# EAGLE board schematic (EAGLE 7.3.0)
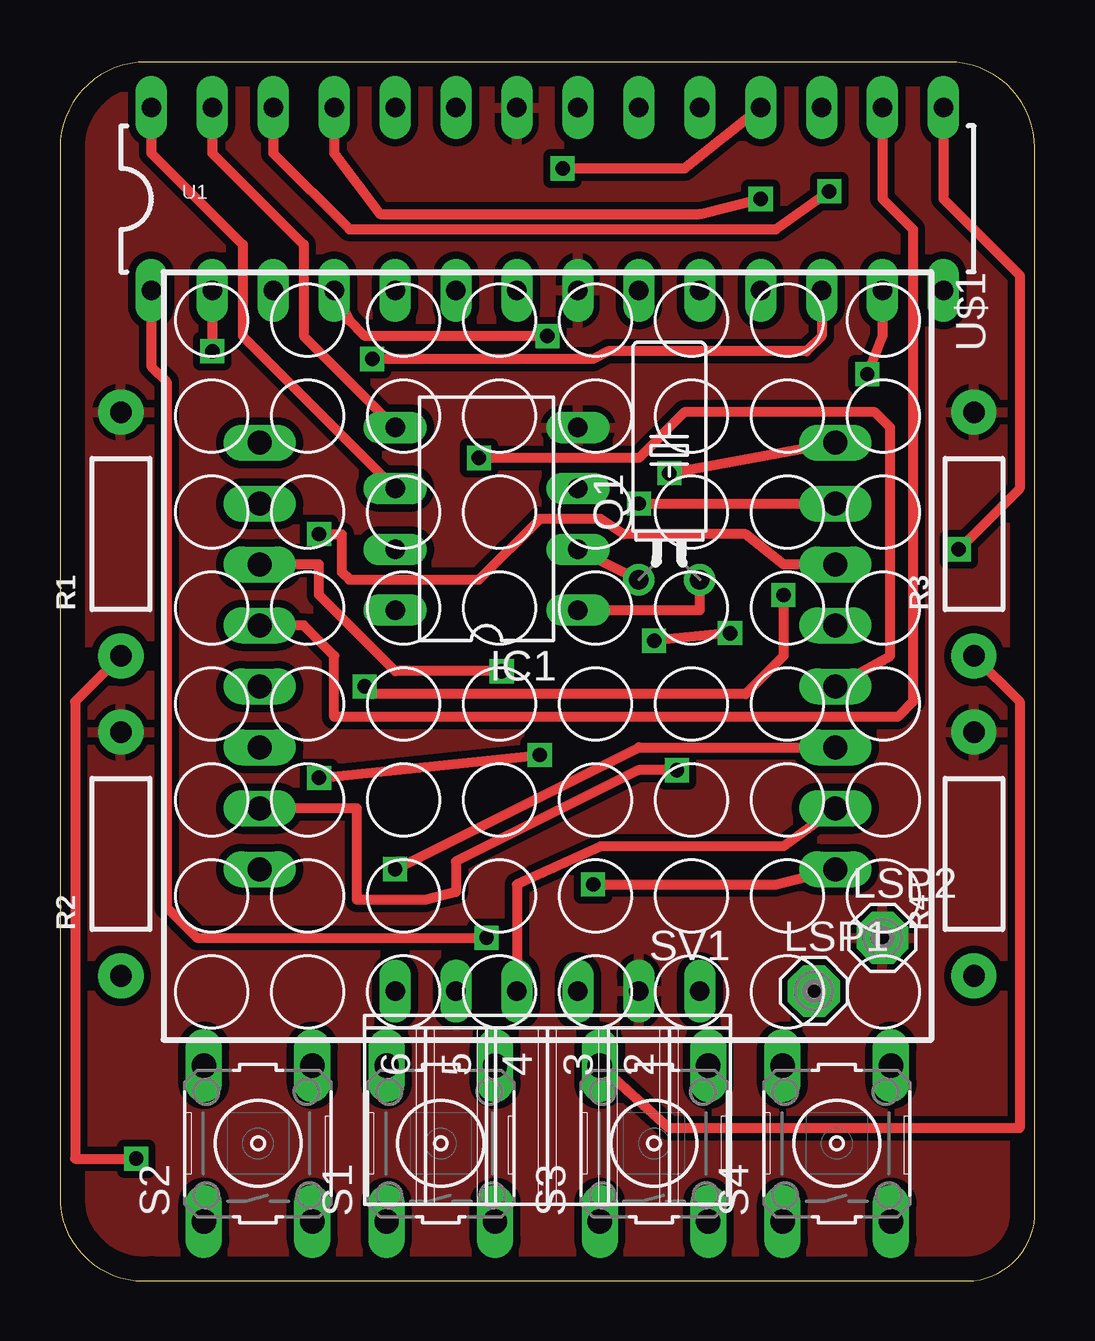
[diagram p0: board, top side]
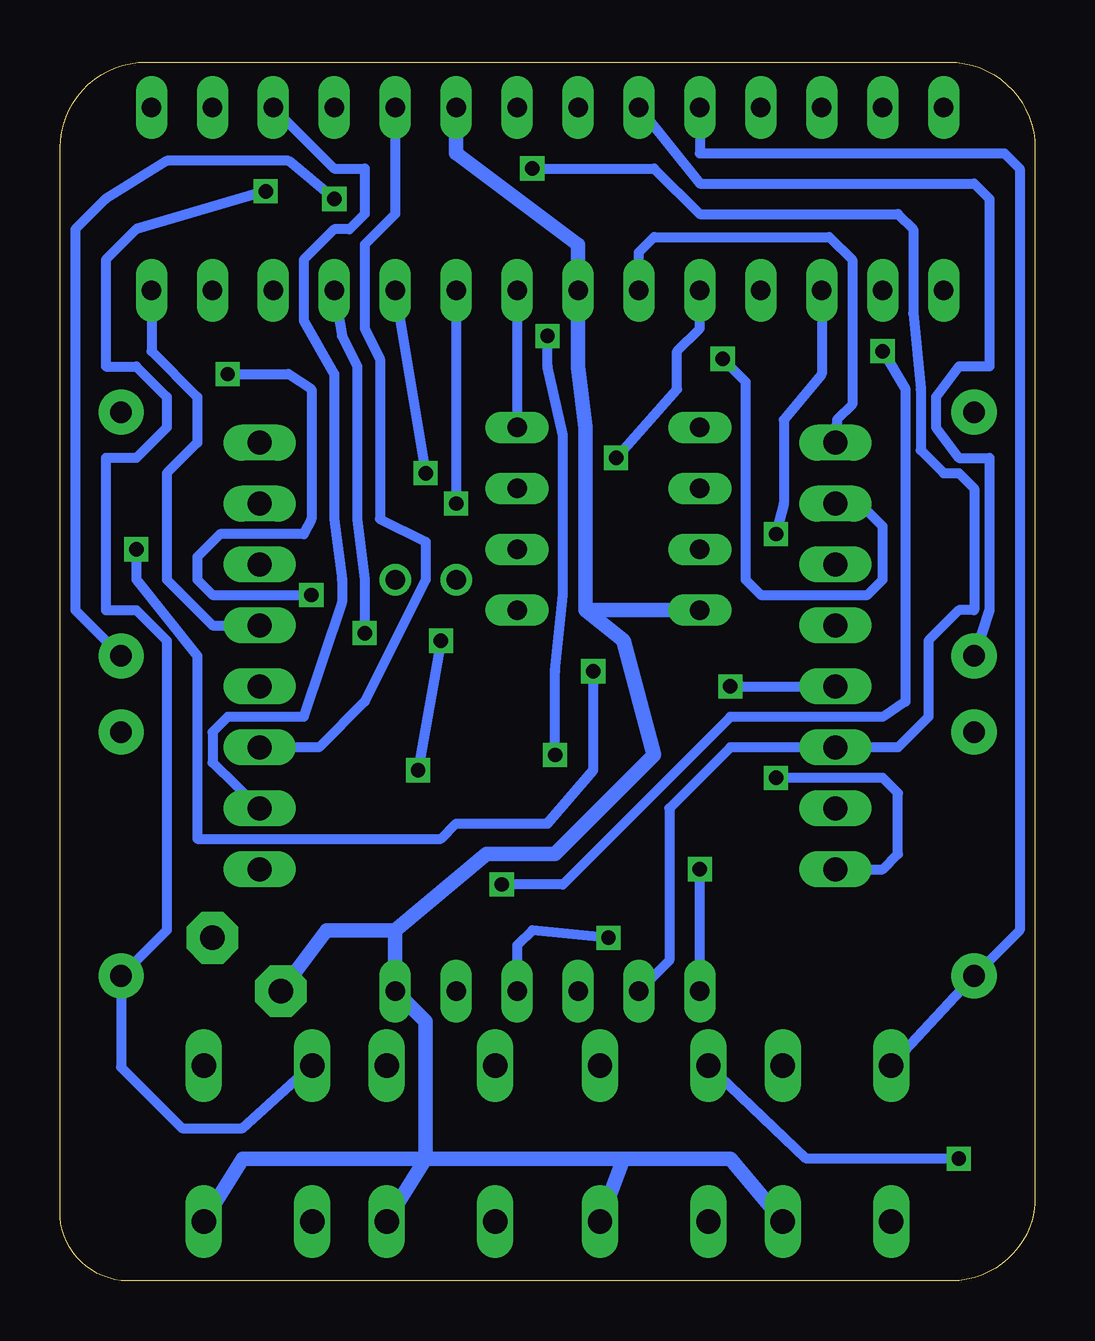
[diagram p1: board, bottom side, seen from below]

Size 40.64 x 50.8 mm. Coordinates in mm from the lower left corner, seen from the top.
Outline: 0,47.22 0,3.19 arc90 3.81,0.01 38.09,0.01 arc90 40.63,3.18 40.63,47.23 arc90 37.05,50.8 3.59,50.8 arc90 0,47.22
Copper layers (1*16): Top 0.035mm / dielectric 1.5mm / Bottom 0.035mm
Design rules "default": minimum track width 10mil, minimum drill 24mil, track to track 8mil, track to pad 8mil, pad to pad 8mil, via to via 8mil, smd to smd 8mil, copper to edge 40mil, drill to drill 8mil, minimum pad ring 10mil, minimum via ring 8mil, stop-mask expansion 4mil, vias tented up to drill 0mil, thermal gap 10mil

## Footprints (pad centres in the part's own frame; a part is rotated, then mirrored left to right if it is on the bottom)
DIL08 = drill 0.813 long: 1 -3.81,-3.81; 2 -1.27,-3.81; 3 1.27,-3.81; 4 3.81,-3.81; 5 3.81,3.81; 6 1.27,3.81; 7 -1.27,3.81; 8 -3.81,3.81
MCS10B = drill 1.016 pad 2.159 octagon: MP 0,0
TC38H = drill 0.813: 1 -1.27,0; 2 1.27,0
AXIAL-0.4 = drill 0.9 pad 1.88: P$1 -5.08,0; P$2 5.08,0
B3F-10XX = drill 1.016 long: 1 -3.251,2.261; 2 3.251,2.261; 3 -3.251,-2.261; 4 3.251,-2.261
FE06W = drill 0.813 long: 1 -6.35,0; 2 -3.81,0; 3 -1.27,0; 4 1.27,0; 5 3.81,0; 6 6.35,0
DIL28-3 = drill 0.813 long: 1 -16.51,-3.81; 2 -13.97,-3.81; 3 -11.43,-3.81; 4 -8.89,-3.81; 5 -6.35,-3.81; 6 -3.81,-3.81; 7 -1.27,-3.81; 8 1.27,-3.81; 9 3.81,-3.81; 10 6.35,-3.81; 11 8.89,-3.81; 12 11.43,-3.81; 13 13.97,-3.81; 14 16.51,-3.81; 15 16.51,3.81; 16 13.97,3.81; 17 11.43,3.81; 18 8.89,3.81; 19 6.35,3.81; 20 3.81,3.81; 21 1.27,3.81; 22 -1.27,3.81; 23 -3.81,3.81; 24 -6.35,3.81; 25 -8.89,3.81; 26 -11.43,3.81; 27 -13.97,3.81; 28 -16.51,3.81
NFM-12881BG-11 = drill 1 long: 1 -8.89,-12; 2 -6.35,-12; 3 -3.81,-12; 4 -1.27,-12; 5 1.27,-12; 6 3.81,-12; 7 6.35,-12; 8 8.89,-12; 9 8.89,12; 10 6.35,12; 11 3.81,12; 12 1.27,12; 13 -1.27,12; 14 -3.81,12; 15 -6.35,12; 16 -8.89,12

## Placement (x,y rotation side)
IC1  PFC8583P  [DIL08]  17.78,31.76 90 top
LSP1  MCS10B  [MCS10B]  31.43,12.08 0 top
LSP2  MCS10B  [MCS10B]  34.29,14.3 0 top
Q1  [TC38H]  25.4,29.22 0 top
R1  [AXIAL-0.4]  2.54,31.13 90 top
R2  [AXIAL-0.4]  2.54,17.79 90 top
R3  [AXIAL-0.4]  38.1,31.13 90 top
R4  [AXIAL-0.4]  38.1,17.79 90 top
S1  [B3F-10XX]  15.88,5.73 90 top
S2  [B3F-10XX]  8.25,5.73 90 top
S3  [B3F-10XX]  24.77,5.73 90 top
S4  [B3F-10XX]  32.39,5.73 90 top
SV1  [FE06W]  20.32,12.08 180 top
U1  ATMEGA328P_PDIP  [DIL28-3]  20.32,45.1 0 top
U$1  NFM-12881BG-11  [NFM-12881BG-11]  20.32,26.05 270 top

## Library data of the parts
IC1 = micro-philips; OC_FARNELL: unknown; OC_NEWARK: unknown
LSP1 LSP2 = solpad
Q1 = crystal; OC_FARNELL: unknown; OC_NEWARK: unknown
R1-R4 = SparkFun-Passives
S1-S4 = switch-omron; MPN: B3F-1000; OC_FARNELL: 176432; OC_NEWARK: 36M3542
SV1 = con-lsta; OC_FARNELL: unknown; OC_NEWARK: unknown
U1 = SparkFun-DigitalIC
U$1 = eagle-library-edeca.net-v5

## Nets
GND: IC1.4 LSP2.MP R1.P$2 R2.P$2 R3.P$2 R4.P$2 SV1.2 U1.8 U1.22
N$2: R2.P$1 S2.2 U1.24
N$3: R1.P$1 S1.2 U1.23
N$4: R3.P$1 S3.2 U1.25
N$5: R4.P$1 S4.2 U1.26
N$9: IC1.1 Q1.2
N$10: IC1.2 Q1.1
N$11: SV1.6 U1.19 U$1.11
N$12: SV1.5 U1.18 U$1.6
N$13: SV1.4 U1.17 U$1.10
N$14: SV1.3 U1.1
N$15: U1.2 U$1.9
N$16: U1.3 U$1.14
N$17: U1.4 U$1.8
N$18: U1.5 U$1.12
N$19: U1.6 U$1.1
N$20: U1.11 U$1.7
N$21: U1.12 U$1.2
N$22: U1.13 U$1.5
N$23: U1.14 U$1.13
N$24: U1.15 U$1.3
N$25: U1.16 U$1.4
N$26: U1.9 U$1.15
N$27: U1.10 U$1.16
N$29: IC1.6 U1.28
N$30: IC1.5 U1.27
VCC: IC1.8 LSP1.MP S1.3 S2.3 S3.3 S4.3 SV1.1 U1.7 U1.20

## Tracks (layer width: path | path; a pad name or v marks a point on that pad's centre or on a via)
GND
  Bottom 0.406: U1.8 IC1.4
  pour Top (isolate 0.305): 0,47.64 0,2.55 0.64,1.28 1.91,0.01 6.35,0.01 37.47,0.01 39.37,0.65 40.64,1.92 40.64,47 40,48.91 38.1,50.81 3.18,50.81 1.27,50.18 0.64,49.54
N$2
  Bottom 0.406: S2.2 R2.P$1 0.64,14.62 0.64,46.37 1.27,47 13.97,47 U1.24
N$3  (via drill 0.6)
  Top 0.406: R1.P$1 0.64,24.14 0.64,5.09 v3.18,5.09
  Bottom 0.406: v3.18,5.09 9.53,5.09 S1.2 | U1.23 13.97,45.73 2.54,45.73 1.91,45.1 1.91,38.11 3.18,38.11 4.13,36.84 4.13,35.57 3.18,34.3 1.91,34.3 1.91,27.95 R1.P$1
N$4  (via drill 0.6)
  Top 0.406: R3.P$1 40,24.14 40,6.36 25.4,6.36 S3.2 | U1.25 11.43,47 13.34,44.46 26.67,44.46 v29.21,45.1
  Bottom 0.406: v29.21,45.1 31.11,46.69 36.2,46.69 38.73,45.1 40,43.83 40,27.95 R3.P$1
N$5  (via drill 0.6)
  Top 0.406: U1.26 8.89,47 12.07,43.83 29.85,43.83 v32.07,45.42
  Bottom 0.406: S4.2 33.02,6.36 35.56,6.36 38.1,8.9 R4.P$1 36.2,14.62 36.2,26.68 37.47,27.95 38.73,27.95 38.73,34.3 37.47,34.3 36.2,35.57 36.2,36.84 37.47,38.11 38.73,38.11 38.73,42.56 37.47,43.83 v32.07,45.42
N$9
  Top 0.406: IC1.1 26.67,27.95 Q1.2
N$10
  Top 0.406: IC1.2 Q1.1
N$11  (via drill 0.6)
  Top 0.406: v13.97,17.16 24.13,22.24 U$1.11
  Bottom 0.406: U1.19 26.67,44.46 27.94,43.19 27.94,39.7 27.31,38.43 27.31,31.76 25.4,30.81 25.4,29.22 27.94,24.14 29.85,22.24 U$1.11 | SV1.6 v13.97,17.16
N$12  (via drill 0.6)
  Top 0.406: U1.18 26.04,46.37 v20.96,46.37
  Bottom 0.406: v20.96,46.37 15.88,46.37 13.97,44.46 5.71,44.46 5.08,43.83 5.08,40.34 4.76,37.16 4.76,34.62 3.81,33.67 3.18,33.67 2.54,33.03 2.54,27.95 3.18,27.95 4.45,26.68 4.45,23.51 5.71,22.24 U$1.6 12.7,22.24 15.24,19.7 15.24,13.35 SV1.5
N$13
  Top 0.406: U$1.10 30.16,18.11 22.54,18.11 19.05,16.52 SV1.4
  Bottom 0.406: U1.17 29.21,46.37 27.94,46.37 27.94,44.46 28.57,43.83 29.21,43.83 30.48,42.56 30.48,40.02 29.21,37.8 29.21,31.76 28.89,29.22 28.89,28.27 30.48,23.51 33.66,23.51 34.29,22.87 34.29,21.6 U$1.10
N$14  (via drill 0.6)
  Top 0.406: U1.1 3.81,38.11 4.45,37.48 4.45,15.57 5.71,14.3 v17.78,14.3
  Bottom 0.406: v17.78,14.3 20.96,14.62 21.59,13.98 SV1.3
N$15  (via drill 0.6)
  Top 0.406: U1.2 v6.35,38.75 | v22.22,16.52 29.85,16.52 U$1.9
  Bottom 0.406: v6.35,38.75 5.4,37.16 5.4,24.14 6.35,23.51 12.7,23.51 19.68,16.52 v22.22,16.52
N$16  (via drill 0.6)
  Top 0.406: U$1.14 30.16,29.86 28.57,31.13 23.5,31.13 22.54,31.76 20,31.76 17.46,29.22 12.07,29.22 11.75,29.54 11.75,31.13 v10.8,31.13
  Bottom 0.406: U1.3 8.89,37.8 10.48,35.89 10.48,32.4 v10.8,31.13
N$17  (via drill 0.6)
  Top 0.406: v10.8,20.97 v20,21.92 | v20.32,39.38 12.7,39.38 12.07,40.02 U1.4
  Bottom 0.406: U$1.8 6.35,17.16 5.71,17.79 5.71,20.33 6.35,20.97 v10.8,20.97 | v20,21.92 20,25.41 19.68,28.59 19.68,35.26 20.32,38.11 v20.32,39.38
N$18  (via drill 0.6)
  Top 0.406: U$1.12 34.61,26.05 34.61,35.57 33.97,36.21 26.04,36.21 24.13,34.3 v17.46,34.3
  Bottom 0.406: v17.46,34.3 14.92,37.16 14.92,38.75 13.97,39.7 U1.5
N$19
  Bottom 0.406: U1.6 16.51,42.88 15.88,43.51 8.57,43.51 7.62,42.56 7.62,36.53 8.25,35.89 U$1.1
N$20  (via drill 0.6)
  Top 0.406: v27.94,27 v24.77,26.68 | v25.72,21.29 24.13,21.29 16.51,17.48 16.51,16.21 15.24,15.89 12.38,15.89 12.38,19.7 U$1.7
  Bottom 0.406: U1.11 28.89,39.38 28.26,38.11 28.26,31.76 27.94,29.22 v27.94,27 | v24.77,26.68 v25.72,21.29
N$21  (via drill 0.6)
  Top 0.406: U1.12 31.75,39.38 31.11,38.75 22.86,38.75 22.22,38.43 v13.02,38.43
  Bottom 0.406: v13.02,38.43 12.07,37.48 12.07,29.22 11.43,28.59 6.98,28.59 6.35,29.22 6.35,31.45 7.3,32.4 U$1.2
N$22  (via drill 0.6)
  Top 0.406: U1.13 34.29,39.38 v33.66,37.8 | v30.16,28.59 30.16,26.05 28.57,24.46 13.02,24.46 v12.7,24.78
  Bottom 0.406: v33.66,37.8 31.11,37.8 30.16,37.16 30.16,31.76 30.48,31.13 33.97,31.13 34.92,30.18 34.92,29.22 34.29,28.59 v30.16,28.59 | v12.7,24.78 U$1.5
N$23
  Bottom 0.406: U1.14 36.83,38.75 34.92,36.84 34.92,34.94 36.2,33.67 36.2,29.22 34.29,27.32 U$1.13
N$24  (via drill 0.6)
  Top 0.406: U1.15 36.83,45.1 40,41.92 40,33.03 v37.47,30.49 | v18.41,25.41 13.97,25.41 10.8,28.59 10.8,29.86 U$1.3
  Bottom 0.406: v37.47,30.49 37.47,29.22 34.92,26.05 34.92,18.43 24.77,18.43 24.13,19.06 20.32,19.06 18.41,21.29 v18.41,25.41
N$25
  Top 0.406: U1.16 34.29,45.1 35.56,43.83 35.56,24.14 34.92,23.51 11.43,23.51 11.43,26.05 10.16,27.32 U$1.4
N$26  (via drill 0.6)
  Top 0.406: v24.13,32.4 U$1.15
  Bottom 0.406: U1.9 v24.13,32.4
N$27  (via drill 0.6)
  Top 0.406: v25.4,33.67 U$1.16
  Bottom 0.406: U1.10 v25.4,33.67
N$29
  Top 0.406: U1.28 3.81,47 7.62,43.19 7.62,39.38 IC1.6
N$30
  Top 0.406: U1.27 6.35,47 10.16,43.19 10.16,39.38 IC1.5
VCC
  Bottom 0.61: S2.3 12.7,5.09 17.14,5.09 | S1.3 17.14,5.09 | 17.14,5.09 25.4,5.09 | S3.3 25.4,5.09 | 25.4,5.09 33.02,5.09 S4.3 | 25.4,5.09 25.4,10.81 SV1.1 26.67,14.62 | IC1.8 18.73,27.95 | 18.73,27.95 17.14,26.68 15.88,21.92 20,17.79 22.86,17.79 26.67,14.62 | 18.73,27.95 18.73,35.57 19.05,38.11 U1.7 19.05,43.19 24.13,47 U1.20 | 26.67,14.62 29.53,14.62 LSP1.MP